# EAGLE board SID to print (EAGLE 5.11)
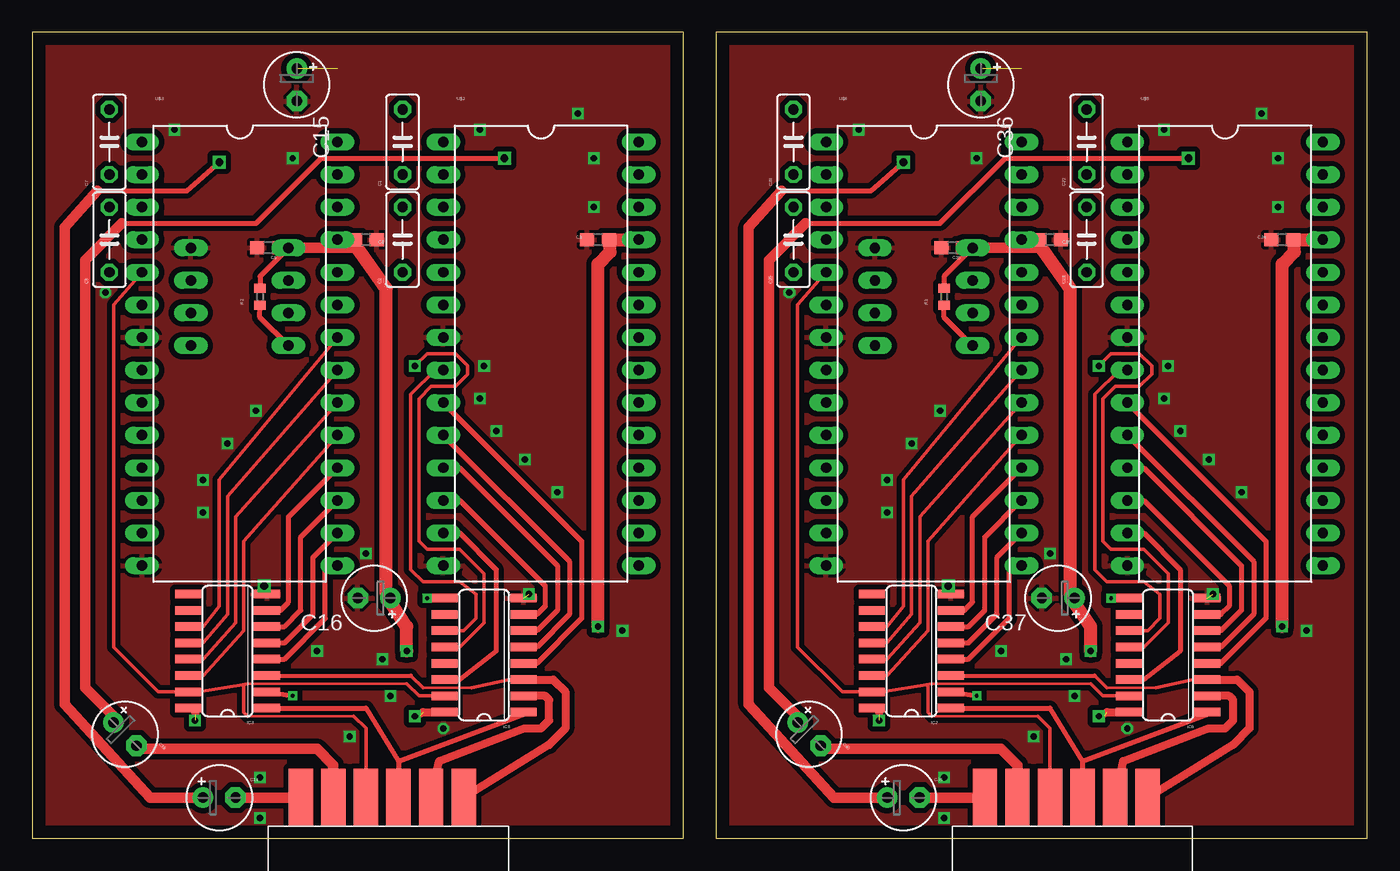
[diagram p0: board, top side]
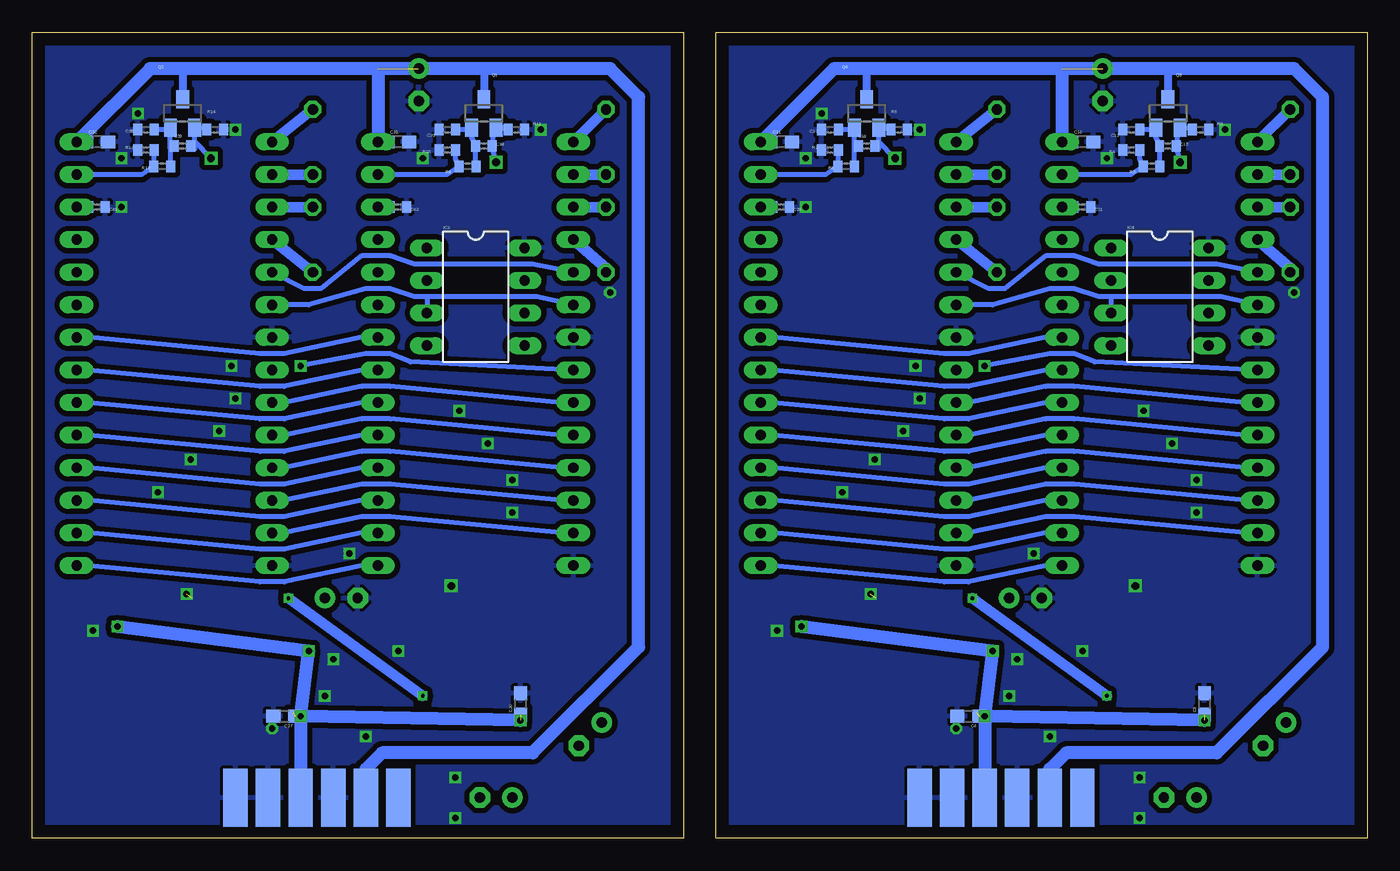
[diagram p1: board, bottom side, seen from below]

Size 104.13 x 62.85 mm. Coordinates in mm from the lower left corner, seen from the top.
Outline: 0,0 50.79,0 50.79,62.85 0,62.85 0,0
Outline: 53.34,0 104.13,0 104.13,62.85 53.34,62.85 53.34,0
Copper layers (1*16): Top 0.035mm / dielectric 1.5mm / Bottom 0.035mm
Design rules "default": minimum track width 10mil, minimum drill 24mil, track to track 8mil, track to pad 8mil, pad to pad 8mil, via to via 8mil, smd to smd 8mil, copper to edge 40mil, drill to drill 8mil, minimum pad ring 10mil, minimum via ring 8mil, stop-mask expansion 4mil, vias tented up to drill 0mil, thermal gap 10mil

## Footprints (pad centres in the part's own frame; a part is rotated, then mirrored left to right if it is on the bottom)
C050-025X075 = drill 0.813 octagon: 1 -2.54,0; 2 2.54,0
C0603 = smd 1.1 x 1: 1 -0.85,0; 2 0.85,0
C0402 = smd 0.7 x 0.9: 1 -0.65,0; 2 0.65,0
E2,5-5 = drill 0.813 pad 1.6 round: + -1.27,0 | drill 0.813 pad 1.6 octagon: - 1.27,0
DIL8 = drill 0.813 long: 1 -3.81,-3.81; 2 -1.27,-3.81; 3 1.27,-3.81; 4 3.81,-3.81; 5 3.81,3.81; 6 1.27,3.81; 7 -1.27,3.81; 8 -3.81,3.81
SO16 = smd 0.66 x 2.032: 1 -4.445,-3.073; 2 -3.175,-3.073; 3 -1.905,-3.073; 4 -0.635,-3.073; 5 0.635,-3.073; 6 1.905,-3.073; 7 3.175,-3.073; 8 4.445,-3.073; 9 4.445,3.073; 10 3.175,3.073; 11 1.905,3.073; 12 0.635,3.073; 13 -0.635,3.073; 14 -1.905,3.073; 15 -3.175,3.073; 16 -4.445,3.073
SOT23 = smd 1 x 1.4: 1 -0.95,-1.1; 2 0.95,-1.1; 3 0,1.1
R0402 = smd 0.7 x 0.9: 1 -0.65,0; 2 0.65,0
SMD_PCB_EGGE_HDC12 = smd 4.5 x 1.9 bottom: 1 2.54,-7.62; 3 2.54,-5.08; 5 2.54,-2.54; 7 2.54,0; 9 2.54,2.54; 11 2.54,5.08 | smd 4.5 x 1.9: 2 2.54,-6.35; 4 2.54,-3.81; 6 2.54,-1.27; 8 2.54,1.27; 10 2.54,3.81; 12 2.54,6.35
DIL28 = drill 0.813 long: 1 -16.51,-7.62; 2 -13.97,-7.62; 3 -11.43,-7.62; 4 -8.89,-7.62; 5 -6.35,-7.62; 6 -3.81,-7.62; 7 -1.27,-7.62; 8 1.27,-7.62; 9 3.81,-7.62; 10 6.35,-7.62; 11 8.89,-7.62; 12 11.43,-7.62; 13 13.97,-7.62; 14 16.51,-7.62; 15 16.51,7.62; 16 13.97,7.62; 17 11.43,7.62; 18 8.89,7.62; 19 6.35,7.62; 20 3.81,7.62; 21 1.27,7.62; 22 -1.27,7.62; 23 -3.81,7.62; 24 -6.35,7.62; 25 -8.89,7.62; 26 -11.43,7.62; 27 -13.97,7.62; 28 -16.51,7.62

## Placement (x,y rotation side)
C1  [C050-025X075]  28.89,54.29 90 top
C2  [C050-025X075]  28.89,46.67 90 top
C3  0u1  [C0603]  44.13,46.67 180 top
C4  0u1  [C0603]  26.04,46.67 0 top
C5  0u1  [C0603]  18.41,46.04 180 top
C6  0u1  [C0603]  31.11,9.52 180 bottom
C7  [C050-025X075]  6.03,54.29 90 top
C8  [C050-025X075]  6.03,46.67 90 top
C9  0u1  [C0603]  12.7,10.48 90 bottom
C10  0u1  [C0603]  22.23,54.29 0 bottom
C11  0u1  [C0603]  45.72,54.29 0 bottom
C12  1n  [C0402]  18.41,55.24 180 bottom
C13  1n  [C0402]  15.56,53.97 0 bottom
C14  [E2,5-5]  14.61,3.18 0 top
C15  [E2,5-5]  20.64,58.74 270 top
C16  [E2,5-5]  26.67,18.73 180 top
C17  1n  [C0402]  41.91,55.24 180 bottom
C18  1n  [C0402]  39.05,53.97 0 bottom
C19  [E2,5-5]  7.25,8.12 315 top
C20  1n  [C0402]  45.72,49.21 0 bottom
C21  1n  [C0402]  22.23,49.21 0 bottom
C22  [C050-025X075]  82.23,54.29 90 top
C23  [C050-025X075]  82.23,46.67 90 top
C24  0u1  [C0603]  97.47,46.67 180 top
C25  0u1  [C0603]  79.38,46.67 0 top
C26  0u1  [C0603]  71.75,46.04 180 top
C27  0u1  [C0603]  84.45,9.52 180 bottom
C28  [C050-025X075]  59.37,54.29 90 top
C29  [C050-025X075]  59.37,46.67 90 top
C30  0u1  [C0603]  66.04,10.48 90 bottom
C31  0u1  [C0603]  75.56,54.29 0 bottom
C32  0u1  [C0603]  99.06,54.29 0 bottom
C33  1n  [C0402]  71.75,55.24 180 bottom
C34  1n  [C0402]  68.9,53.97 0 bottom
C35  [E2,5-5]  67.94,3.18 0 top
C36  [E2,5-5]  73.98,58.74 270 top
C37  [E2,5-5]  80.01,18.73 180 top
C38  1n  [C0402]  95.25,55.24 180 bottom
C39  1n  [C0402]  92.39,53.97 0 bottom
C40  [E2,5-5]  60.59,8.12 315 top
C41  1n  [C0402]  99.06,49.21 0 bottom
C42  1n  [C0402]  75.56,49.21 0 bottom
IC1  PIC12F683P  [DIL8]  69.53,42.23 270 bottom
IC2  4094D  [SO16]  68.58,14.6 90 top
IC3  4094D  [SO16]  15.24,14.6 90 top
IC4  PIC12F683P  [DIL8]  16.19,42.23 270 bottom
IC5  4094D  [SO16]  35.24,14.29 90 top
IC6  4094D  [SO16]  88.58,14.29 90 top
Q1  BC848BSMD  [SOT23]  68.9,56.52 0 bottom
Q2  BC848BSMD  [SOT23]  92.39,56.52 0 bottom
Q3  BC848BSMD  [SOT23]  15.56,56.52 0 bottom
Q4  BC848BSMD  [SOT23]  39.05,56.52 0 bottom
R1  10k  [R0402]  71.12,42.23 90 top
R2  10k  [R0402]  17.78,42.23 90 top
R3  10k  [R0402]  16.83,52.39 180 bottom
R4  1k  [R0402]  18.41,53.66 180 bottom
R5  1k  [R0402]  13.02,55.24 0 bottom
R6  10k  [R0402]  40.64,52.39 180 bottom
R7  1k  [R0402]  41.91,53.66 180 bottom
R8  1k  [R0402]  36.51,55.24 0 bottom
R9  10k  [R0402]  70.17,52.39 180 bottom
R10  1k  [R0402]  71.75,53.66 180 bottom
R11  1k  [R0402]  66.36,55.24 0 bottom
R12  10k  [R0402]  93.98,52.39 180 bottom
R13  1k  [R0402]  95.25,53.66 180 bottom
R14  1k  [R0402]  89.85,55.24 0 bottom
U$1  SMD_PCBEDGE_HDC12  [SMD_PCB_EGGE_HDC12]  27.3,0.64 90 top
U$2  SID6581  [DIL28]  39.69,37.78 270 top
U$3  SID6581  [DIL28]  16.19,37.78 270 top
U$4  SMD_PCBEDGE_HDC12  [SMD_PCB_EGGE_HDC12]  80.64,0.64 90 top
U$5  SID6581  [DIL28]  93.03,37.78 270 top
U$6  SID6581  [DIL28]  69.53,37.78 270 top

## Library data of the parts
C1-C42 R1-R14 = rcl
IC1 IC4 = microchip; MF: MICROCHIP; MPN: PIC12F683-I/P; OC_FARNELL: 9759034; OC_NEWARK: 89H0442
IC2 IC3 IC5 IC6 = 40xx
Q1-Q4 = transistor-npn
U$1 U$4 = edgeMounted_HDC
U$2 U$3 U$5 U$6 = SID6581

## Nets
+5V: C3.1 C4.1 C5.1 C6.1 C9.1 C16.+ IC3.16 IC4.1 IC5.16 R2.2 U$1.5 U$2.25 U$3.25
+5V1: C24.1 C25.1 C26.1 C27.1 C30.1 C37.+ IC1.1 IC2.16 IC6.16 R1.2 U$4.5 U$5.25 U$6.25
+12V: C10.1 C11.1 C15.+ Q3.3 Q4.3 U$1.9 U$2.28 U$3.28
+12V1: C31.1 C32.1 C36.+ Q1.3 Q2.3 U$4.9 U$5.28 U$6.28
A0: IC5.4 U$2.9 U$3.9
A1: IC5.5 U$2.10 U$3.10
A2: IC5.6 U$2.11 U$3.11
A3: IC5.7 U$2.12 U$3.12
A4: IC5.14 U$2.13 U$3.13
A5: IC6.4 U$5.9 U$6.9
A6: IC6.5 U$5.10 U$6.10
A7: IC6.6 U$5.11 U$6.11
A8: IC6.7 U$5.12 U$6.12
A9: IC6.14 U$5.13 U$6.13
AOUT_L: C19.- U$1.10
AOUT_L1: C40.- U$4.10
AOUT_R: C14.- U$1.12
AOUT_R1: C35.- U$4.12
CS1#: IC5.11 U$2.8
CS1#1: IC6.11 U$5.8
CS2#: IC5.12 U$3.8
CS2#1: IC6.12 U$6.8
D0: IC3.4 U$2.15 U$3.15
D1: IC3.5 U$2.16 U$3.16
D2: IC3.6 U$2.17 U$3.17
D3: IC3.7 U$2.18 U$3.18
D4: IC3.14 U$2.19 U$3.19
D5: IC3.13 U$2.20 U$3.20
D6: IC3.12 U$2.21 U$3.21
D7: IC3.11 U$2.22 U$3.22
D8: IC2.11 U$5.22 U$6.22
D9: IC2.12 U$5.21 U$6.21
D10: IC2.13 U$5.20 U$6.20
D11: IC2.14 U$5.19 U$6.19
D12: IC2.7 U$5.18 U$6.18
D13: IC2.6 U$5.17 U$6.17
D14: IC2.5 U$5.16 U$6.16
D15: IC2.4 U$5.15 U$6.15
GND: C3.2 C4.2 C5.2 C6.2 C9.2 C10.2 C11.2 C12.2 C15.- C16.- C17.2 C20.2 C21.2 IC3.8 IC4.8 IC5.8 R4.2 R5.2 R7.2 R8.2 U$1.1 U$1.3 U$1.7 U$2.7 U$2.14 U$3.7 U$3.14
GND1: C24.2 C25.2 C26.2 C27.2 C30.2 C31.2 C32.2 C33.2 C36.- C37.- C38.2 C41.2 C42.2 IC1.8 IC2.8 IC6.8 R10.2 R11.2 R13.2 R14.2 U$4.1 U$4.3 U$4.7 U$5.7 U$5.14 U$6.7 U$6.14
LATCH: IC3.1 IC5.1 U$1.6
LATCH1: IC2.1 IC6.1 U$4.6
M_CLK: IC4.3 U$2.6 U$3.6
M_CLK1: IC1.3 U$5.6 U$6.6
N$1: C1.2 U$2.1
N$2: C2.2 U$2.3
N$3: C1.1 U$2.2
N$4: C2.1 U$2.4
N$5: C7.2 U$3.1
N$6: C8.2 U$3.3
N$7: C7.1 U$3.2
N$8: C8.1 U$3.4
N$9: IC3.2 IC5.9
N$10: C22.2 U$5.1
N$11: R3.2 R4.1 U$3.27
N$12: C12.1 C13.1 Q3.1 R3.1
N$13: C13.2 C14.+ Q3.2 R5.1
N$14: C23.2 U$5.3
N$15: IC4.4 R2.1
N$16: C22.1 U$5.2
N$17: C23.1 U$5.4
N$18: R6.2 R7.1 U$2.27
N$19: C17.1 C18.1 Q4.1 R6.1
N$20: C18.2 C19.+ Q4.2 R8.1
N$21: C28.2 U$6.1
N$22: C29.2 U$6.3
N$23: C21.1 U$3.26
N$24: C20.1 U$2.26
N$25: C28.1 U$6.2
N$26: C29.1 U$6.4
N$27: IC1.4 R1.1
N$28: IC2.2 IC6.9
N$29: R9.2 R10.1 U$6.27
N$30: C33.1 C34.1 Q1.1 R9.1
N$31: C34.2 C35.+ Q1.2 R11.1
N$32: R12.2 R13.1 U$5.27
N$33: C38.1 C39.1 Q2.1 R12.1
N$34: C39.2 C40.+ Q2.2 R14.1
N$35: C42.1 U$6.26
N$36: C41.1 U$5.26
OE/RST#: IC3.15 IC5.15 U$1.8 U$2.5 U$3.5
OE/RST#1: IC2.15 IC6.15 U$4.8 U$5.5 U$6.5
SCK: IC3.3 IC5.3 U$1.2
SCK1: IC2.3 IC6.3 U$4.2
SDI: IC5.2 U$1.4
SDI1: IC6.2 U$4.4

## Tracks (layer width: path | path; a pad name or v marks a point on that pad's centre or on a via)
+5V  (via drill 0.5)  (2 unrouted)
  Top 0.406: IC3.16 12.7,10.06 | C4.1 24.34,46.78 U$3.25 | C5.1 IC4.1 17.78,43.82 R2.2
  Top 0.61: v29.84,9.52 30.48,9.84 IC5.16 | 12.7,10.06 v12.7,9.21
  Top 0.813: IC4.1 25.34,46.04 24.95,46.6
  Top 1.016: v29.21,14.6 29.21,16.51 27.94,18.42 C16.+ 27.62,19.05 27.62,42.86 24.95,46.6 U$3.25 | v44.13,16.51 44.13,44.77 45.09,45.72 45.09,46.57 C3.1 U$2.25
  Bottom 1.016: v29.84,9.52 U$1.5 | v29.84,9.52 v29.21,14.6 v44.13,16.51 | v12.7,9.21 v29.84,9.52
+5V1  (via drill 0.5)  (2 unrouted)
  Top 0.406: IC2.16 66.04,10.06 | C25.1 77.69,46.78 U$6.25 | C26.1 IC1.1 71.12,43.82 R1.2
  Top 0.61: v83.19,9.52 83.82,9.84 IC6.16 | 66.04,10.06 v66.04,9.21
  Top 0.813: IC1.1 78.68,46.04 78.29,46.6
  Top 1.016: v82.55,14.6 82.55,16.51 81.28,18.42 C37.+ 80.96,19.05 80.96,42.86 78.29,46.6 U$6.25 | v97.47,16.51 97.47,44.77 98.42,45.72 98.42,46.57 C24.1 U$5.25
  Bottom 1.016: v83.19,9.52 U$4.5 | v83.19,9.52 v82.55,14.6 v97.47,16.51 | v66.04,9.21 v83.19,9.52
+12V  (1 unrouted)
  Bottom 0.61: 15.56,60.01 Q3.3 | 39.05,60.01 Q4.3
  Bottom 1.016: U$1.9 24.77,5.4 23.5,6.67 11.75,6.67 3.49,14.92 3.49,57.78 5.71,60.01 15.56,60.01 23.81,60.01 | 23.81,60.01 39.05,60.01 41.59,60.01 U$2.28 C11.1 | C10.1 U$3.28 23.81,60.01
+12V1  (1 unrouted)
  Bottom 0.61: 68.9,60.01 Q1.3 | 92.39,60.01 Q2.3
  Bottom 1.016: U$4.9 78.11,5.4 76.83,6.67 65.09,6.67 56.83,14.92 56.83,57.78 59.05,60.01 68.9,60.01 77.15,60.01 | 77.15,60.01 92.39,60.01 94.93,60.01 U$5.28 C32.1 | C31.1 U$6.28 77.15,60.01
A0
  Top 0.406: IC5.4 39.37,13.65 42.86,17.14 42.86,23.18 U$2.9
  Bottom 0.406: U$3.9 9.53,33.97 22.86,35.24 25.08,35.24 31.11,33.97 U$2.9
A1
  Top 0.406: IC5.5 39.37,14.92 41.91,17.46 41.91,21.59 U$2.10
  Bottom 0.406: U$3.10 9.53,31.43 22.86,32.7 25.08,32.7 31.11,31.43 U$2.10
A2
  Top 0.406: IC5.6 39.37,16.19 40.96,17.78 40.96,21.27 33.34,28.89 U$2.11
  Bottom 0.406: 9.53,28.89 22.86,30.16 25.08,30.16 31.11,28.89 U$2.11
  Bottom 0.61: U$3.11 9.53,28.89
A3
  Top 0.406: IC5.7 39.37,17.46 40.01,18.1 40.01,19.69 33.34,26.35 U$2.12
  Bottom 0.406: U$3.12 9.53,26.35 22.86,27.62 25.08,27.62 31.11,26.35 U$2.12
A4
  Top 0.406: IC5.14 33.34,12.38 36.2,14.6 36.2,20.96 33.34,23.81 U$2.13
  Bottom 0.406: U$3.13 9.53,23.81 22.86,25.08 25.08,25.08 31.11,23.81 U$2.13
A5
  Top 0.406: IC6.4 92.71,13.65 96.2,17.14 96.2,23.18 U$5.9
  Bottom 0.406: U$6.9 62.87,33.97 76.2,35.24 78.42,35.24 84.45,33.97 U$5.9
A6
  Top 0.406: IC6.5 92.71,14.92 95.25,17.46 95.25,21.59 U$5.10
  Bottom 0.406: U$6.10 62.87,31.43 76.2,32.7 78.42,32.7 84.45,31.43 U$5.10
A7
  Top 0.406: IC6.6 92.71,16.19 94.3,17.78 94.3,21.27 86.68,28.89 U$5.11
  Bottom 0.406: 62.87,28.89 76.2,30.16 78.42,30.16 84.45,28.89 U$5.11
  Bottom 0.61: U$6.11 62.87,28.89
A8
  Top 0.406: IC6.7 92.71,17.46 93.34,18.1 93.34,19.69 86.68,26.35 U$5.12
  Bottom 0.406: U$6.12 62.87,26.35 76.2,27.62 78.42,27.62 84.45,26.35 U$5.12
A9
  Top 0.406: IC6.14 86.68,12.38 89.53,14.6 89.53,20.96 86.68,23.81 U$5.13
  Bottom 0.406: U$6.13 62.87,23.81 76.2,25.08 78.42,25.08 84.45,23.81 U$5.13
AOUT_L
  Top 0.813: U$1.10 23.5,5.71 22.23,6.99 8.39,6.99 C19.-
AOUT_L1
  Top 0.813: U$4.10 76.83,5.71 75.56,6.99 61.73,6.99 C40.-
AOUT_R
  Top 0.813: C14.- U$1.12
AOUT_R1
  Top 0.813: C35.- U$4.12
CS1#
  Top 0.254: IC5.11 33.66,16.19 34.61,17.14 34.61,19.05 33.34,20 30.48,20 29.53,20.96 29.53,34.61 31.43,36.51 U$2.8
CS1#1
  Top 0.254: IC6.11 87,16.19 87.95,17.14 87.95,19.05 86.68,20 83.82,20 82.87,20.96 82.87,34.61 84.77,36.51 U$5.8
CS2#  (via drill 0.5)
  Top 0.254: IC5.12 33.34,14.92 35.24,16.83 35.24,20.64 33.34,22.54 30.8,22.54 30.16,23.18 30.16,34.29 31.11,35.24 33.02,35.24 33.97,36.2 33.97,36.83 33.02,37.78 30.8,37.78 v29.84,36.83
  Bottom 0.406: v29.84,36.83 24.77,37.78 22.86,37.78 21.27,37.15 U$3.8
CS2#1  (via drill 0.5)
  Top 0.254: IC6.12 86.68,14.92 88.58,16.83 88.58,20.64 86.68,22.54 84.14,22.54 83.5,23.18 83.5,34.29 84.45,35.24 86.36,35.24 87.31,36.2 87.31,36.83 86.36,37.78 84.14,37.78 v83.19,36.83
  Bottom 0.406: v83.19,36.83 78.11,37.78 76.2,37.78 74.61,37.15 U$6.8
D0
  Top 0.406: IC3.4 19.68,13.97 22.86,17.14 22.86,21.27 U$3.15
  Bottom 0.406: U$3.15 25.08,21.27 31.11,20 33.02,20 46.35,21.27 U$2.15
D1
  Top 0.406: IC3.5 19.68,15.24 21.91,17.46 21.91,21.91 U$3.16
  Bottom 0.406: U$3.16 25.08,23.81 31.11,22.54 33.02,22.54 46.35,23.81 U$2.16
D2
  Top 0.406: IC3.6 19.68,16.51 20.95,17.78 20.95,23.49 U$3.17
  Bottom 0.406: U$3.17 25.08,26.35 31.11,25.08 33.02,25.08 46.35,26.35 U$2.17
D3
  Top 0.406: IC3.7 19.37,17.78 20,18.42 20,25.08 U$3.18
  Bottom 0.406: U$3.18 25.08,28.89 31.11,27.62 33.02,27.62 46.35,28.89 U$2.18
D4
  Top 0.254: IC3.14 13.34,12.7 16.51,16.19 16.51,23.18 U$3.19
  Bottom 0.406: U$3.19 25.08,31.43 31.11,30.16 33.02,30.16 46.35,31.43 U$2.19
D5
  Top 0.254: IC3.13 13.34,13.97 15.88,16.83 15.88,25.08 U$3.20
  Bottom 0.406: U$3.20 25.08,33.97 31.11,32.7 33.02,32.7 46.35,33.97 U$2.20
D6
  Top 0.254: IC3.12 13.34,15.24 15.24,17.46 15.24,26.67 U$3.21
  Bottom 0.406: U$3.21 25.08,36.51 31.11,35.24 33.02,35.24 46.35,36.51 U$2.21
D7
  Top 0.254: IC3.11 13.34,16.51 14.61,18.1 14.61,27.94 U$3.22
  Bottom 0.406: U$3.22 25.08,39.05 31.11,37.78 33.02,37.78 46.35,39.05 U$2.22
D8
  Top 0.254: IC2.11 66.67,16.51 67.94,18.1 67.94,27.94 U$6.22
  Bottom 0.406: U$6.22 78.42,39.05 84.45,37.78 86.36,37.78 99.69,39.05 U$5.22
D9
  Top 0.254: IC2.12 66.67,15.24 68.58,17.46 68.58,26.67 U$6.21
  Bottom 0.406: U$6.21 78.42,36.51 84.45,35.24 86.36,35.24 99.69,36.51 U$5.21
D10
  Top 0.254: IC2.13 66.67,13.97 69.22,16.83 69.22,25.08 U$6.20
  Bottom 0.406: U$6.20 78.42,33.97 84.45,32.7 86.36,32.7 99.69,33.97 U$5.20
D11
  Top 0.254: IC2.14 66.67,12.7 69.85,16.19 69.85,23.18 U$6.19
  Bottom 0.406: U$6.19 78.42,31.43 84.45,30.16 86.36,30.16 99.69,31.43 U$5.19
D12
  Top 0.406: IC2.7 72.71,17.78 73.34,18.42 73.34,25.08 U$6.18
  Bottom 0.406: U$6.18 78.42,28.89 84.45,27.62 86.36,27.62 99.69,28.89 U$5.18
D13
  Top 0.406: IC2.6 73.03,16.51 74.3,17.78 74.3,23.49 U$6.17
  Bottom 0.406: U$6.17 78.42,26.35 84.45,25.08 86.36,25.08 99.69,26.35 U$5.17
D14
  Top 0.406: IC2.5 73.03,15.24 75.25,17.46 75.25,21.91 U$6.16
  Bottom 0.406: U$6.16 78.42,23.81 84.45,22.54 86.36,22.54 99.69,23.81 U$5.16
D15
  Top 0.406: IC2.4 73.03,13.97 76.2,17.14 76.2,21.27 U$6.15
  Bottom 0.406: U$6.15 78.42,21.27 84.45,20 86.36,20 99.69,21.27 U$5.15
GND  (via drill 0.5, 0.6)  (1 unrouted)
  other vias: 46.04,16.19 18.1,19.69 38.73,19.05 17.78,4.76 17.78,1.59 24.77,7.94 22.23,14.6 27.3,13.97 26.04,22.23 40.96,26.99 38.42,29.53 36.2,31.75 34.92,34.29 35.24,36.83 17.46,33.34 15.24,30.8 13.34,27.94 13.34,25.4 32.07,8.57 27.94,11.11 34.92,55.24 42.55,56.52 43.81,49.21 43.81,53.02 20.32,53.02 11.11,55.24 5.71,42.54
  pour Bottom (isolate 0.406): 0,0 51.12,0 51.12,62.86 0,62.86
  pour Top (isolate 0.406): 0,0 51.12,0 51.12,62.86 0,62.86
GND1  (via drill 0.5, 0.6)  (1 unrouted)
  other vias: 99.38,16.19 71.44,19.69 92.08,19.05 71.12,4.76 71.12,1.59 78.11,7.94 75.56,14.6 80.64,13.97 79.38,22.23 94.3,26.99 91.76,29.53 89.53,31.75 88.27,34.29 88.58,36.83 70.8,33.34 68.58,30.8 66.67,27.94 66.67,25.4 85.41,8.57 81.28,11.11 88.27,55.24 95.89,56.52 97.16,49.21 97.16,53.02 73.66,53.02 64.45,55.24 59.05,42.54
  pour Bottom (isolate 0.406): 53.34,0 104.46,0 104.46,62.86 53.34,62.86
  pour Top (isolate 0.406): 53.34,0 104.46,0 104.46,62.86 53.34,62.86
LATCH
  Top 0.406: IC3.1 26.04,10.16 28.57,6.03 | 28.57,6.03 U$1.6 | IC5.1 38.73,9.84 28.57,6.03
LATCH1
  Top 0.406: IC2.1 79.38,10.16 81.92,6.03 | 81.92,6.03 U$4.6 | IC6.1 92.08,9.84 81.92,6.03
M_CLK
  Bottom 0.406: U$2.6 29.21,41.59 24.77,42.86 22.86,42.86 20.95,42.23 20,42.23 | 20,42.23 11.43,42.23 U$3.6 | 20,42.23 IC4.3
M_CLK1
  Bottom 0.406: U$5.6 82.55,41.59 78.11,42.86 76.2,42.86 74.3,42.23 73.34,42.23 | 73.34,42.23 64.77,42.23 U$6.6 | 73.34,42.23 IC1.3
N$1
  Bottom 0.813: C1.2 U$2.1
N$2
  Bottom 0.813: C2.2 U$2.3
N$3
  Bottom 0.813: C1.1 U$2.2
N$4
  Bottom 0.813: C2.1 U$2.4
N$5
  Bottom 0.813: C7.2 U$3.1
N$6
  Bottom 0.813: C8.2 U$3.3
N$7
  Bottom 0.813: C7.1 U$3.2
N$8
  Bottom 0.813: C8.1 6.03,44.45 U$3.4
N$9  (via drill 0.3)
  Top 0.406: IC3.2 v20.32,11.11 | v30.8,18.73 IC5.9
  Bottom 0.813: v20.32,11.11 v30.8,18.73
N$10
  Bottom 0.813: C22.2 U$5.1
N$11
  Bottom 0.406: R4.1 17.77,52.99 R3.2 18.43,51.75 U$3.27
N$12
  Bottom 0.406: 16.68,55.24 C12.1 | Q3.1 16.51,54.71 C13.1 16.21,52.74 R3.1
  Bottom 0.61: Q3.1 16.68,55.24
N$13  (via drill 0.6)
  Top 0.406: 5.08,50.48 12.06,50.48 v14.61,52.71
  Top 0.813: C14.+ 9.21,3.18 2.54,10.48 2.54,47.63 5.08,50.48
  Bottom 0.406: 14.71,55.32 C13.2 v14.61,52.71 | R5.1 13.67,55.42 Q3.2
  Bottom 0.61: 14.71,55.32 Q3.2
N$14
  Bottom 0.813: C23.2 U$5.3
N$15
  Top 0.406: IC4.4 17.77,40.64 R2.1
N$16
  Bottom 0.813: C22.1 U$5.2
N$17
  Bottom 0.813: C23.1 U$5.4
N$18
  Bottom 0.406: R7.1 41.26,52.74 R6.2 42.24,51.75 U$2.27
N$19
  Bottom 0.406: 40.17,55.24 C17.1 | Q4.1 40,53.76 C18.1 39.99,53.69 R6.1
  Bottom 0.61: Q4.1 40.17,55.24
N$20  (via drill 0.6)
  Top 0.406: 6.99,47.94 17.46,47.94 22.54,53.02 v36.83,53.02
  Top 0.813: C19.+ 6.35,9.53 4.13,11.75 4.13,45.09 6.99,47.94
  Bottom 0.406: 37.31,55.42 Q4.2 38.1,53.76 C18.2 38.09,54.29 v36.83,53.02
  Bottom 0.61: 37.31,55.42 R8.1
N$21
  Bottom 0.813: C28.2 U$6.1
N$22
  Bottom 0.813: C29.2 U$6.3
N$23
  Bottom 0.406: C21.1 U$3.26
N$24
  Bottom 0.406: U$2.26 C20.1
N$25
  Bottom 0.813: C28.1 U$6.2
N$26
  Bottom 0.813: C29.1 59.37,44.45 U$6.4
N$27
  Top 0.406: IC1.4 71.11,40.64 R1.1
N$28  (via drill 0.3)
  Top 0.406: IC2.2 v73.66,11.11 | v84.14,18.73 IC6.9
  Bottom 0.813: v73.66,11.11 v84.14,18.73
N$29
  Bottom 0.406: R10.1 71.11,52.99 R9.2 71.77,51.75 U$6.27
N$30
  Bottom 0.406: 70.02,55.24 C33.1 | Q1.1 69.85,54.71 C34.1 69.55,52.74 R9.1
  Bottom 0.61: Q1.1 70.02,55.24
N$31  (via drill 0.6)
  Top 0.406: 58.42,50.48 65.41,50.48 v67.94,52.71
  Top 0.813: C35.+ 62.55,3.18 55.88,10.48 55.88,47.63 58.42,50.48
  Bottom 0.406: 68.05,55.32 C34.2 v67.94,52.71 | R11.1 67.01,55.42 Q1.2
  Bottom 0.61: 68.05,55.32 Q1.2
N$32
  Bottom 0.406: R13.1 94.6,52.74 R12.2 95.58,51.75 U$5.27
N$33
  Bottom 0.406: 93.51,55.24 C38.1 | Q2.1 93.34,53.76 C39.1 93.33,53.69 R12.1
  Bottom 0.61: Q2.1 93.51,55.24
N$34  (via drill 0.6)
  Top 0.406: 60.33,47.94 70.8,47.94 75.88,53.02 v90.17,53.02
  Top 0.813: C40.+ 59.69,9.53 57.47,11.75 57.47,45.09 60.33,47.94
  Bottom 0.406: 90.66,55.42 Q2.2 91.44,53.76 C39.2 91.42,54.29 v90.17,53.02
  Bottom 0.61: 90.66,55.42 R14.1
N$35
  Bottom 0.406: C42.1 U$6.26
N$36
  Bottom 0.406: U$5.26 C41.1
OE/RST#
  Top 0.2: 16.83,12.07 29.21,12.07 | 16.83,9.52 25.08,9.52
  Top 0.254: IC5.15 30.16,11.11 29.21,12.07 | 16.42,12 13.02,11.43 IC3.15 9.84,11.43 6.35,14.92 6.35,41.59 U$3.5 | 16.42,12 16.83,12.07 | U$1.8 26.04,8.57 25.08,9.52 | 16.83,9.52 16.51,9.84 16.51,11.9 16.42,12
  Bottom 0.406: U$3.5 11.75,44.77 20.95,44.77 22.86,45.4 25.08,45.4 28.26,42.86 29.53,42.86 U$2.5
OE/RST#1
  Top 0.2: 70.17,12.07 82.55,12.07 | 70.17,9.52 78.42,9.52
  Top 0.254: IC6.15 83.5,11.11 82.55,12.07 | 69.76,12 66.36,11.43 IC2.15 63.18,11.43 59.69,14.92 59.69,41.59 U$6.5 | 69.76,12 70.17,12.07 | U$4.8 79.38,8.57 78.42,9.52 | 70.17,9.52 69.85,9.84 69.85,11.9 69.76,12
  Bottom 0.406: U$6.5 65.09,44.77 74.3,44.77 76.2,45.4 78.42,45.4 81.6,42.86 82.87,42.86 U$5.5
SCK
  Top 0.2: 30.48,11.75 34.29,11.75
  Top 0.254: 29.53,12.7 30.48,11.75 | IC5.3 37.15,12.38 34.29,11.75
  Top 0.305: IC3.3 29.53,12.7
  Top 0.61: U$1.2 40.32,7.3 41.59,8.57 41.59,11.43 40.64,12.38 IC5.3
SCK1
  Top 0.2: 83.82,11.75 87.63,11.75
  Top 0.254: 82.87,12.7 83.82,11.75 | IC6.3 90.49,12.38 87.63,11.75
  Top 0.305: IC2.3 82.87,12.7
  Top 0.61: U$4.2 93.66,7.3 94.93,8.57 94.93,11.43 93.98,12.38 IC6.3
SDI
  Top 0.61: U$1.4 31.75,6.03 38.42,8.57 39.69,8.57 40.32,9.21 40.32,10.8 40.01,11.11 IC5.2
SDI1
  Top 0.61: U$4.4 85.09,6.03 91.76,8.57 93.03,8.57 93.66,9.21 93.66,10.8 93.34,11.11 IC6.2